# EAGLE board demo1 (EAGLE 9.0.0)

Size 100 x 80 mm. Coordinates in mm from the lower left corner, seen from the top.
Outline: 0,0 100,0 100,80 0,80 0,0
Copper layers (1*16): Top 0.035mm / dielectric 1.5mm / Bottom 0.035mm
Design rules "default": minimum track width 6mil, minimum drill 0.35mm, track to track 6mil, track to pad 6mil, pad to pad 6mil, via to via 6mil, smd to smd 6mil, copper to edge 40mil, drill to drill 6mil, minimum pad ring 10mil, minimum via ring 8mil, stop-mask expansion 4mil, vias tented up to drill 0mil, thermal gap 10mil
Net classes: 0 default: width 0.3 mm, drill 0.6 mm, clearance 0.2 mm; 1 power: width 0.4 mm, drill 0.6 mm, clearance 0.2 mm

## Footprints (pad centres in the part's own frame; a part is rotated, then mirrored left to right if it is on the bottom)
C1206 = smd 1.6 x 1.8: 1 -1.4,0; 2 1.4,0
C025-025X050 = drill 0.813 octagon: 1 -1.27,0; 2 1.27,0
TAP5-45 = drill 0.813: + -2.54,0 | drill 0.813 octagon: - 2.54,0
DO35-10 = drill 0.813 long: A 5.08,0; C -5.08,0
DIL18 = drill 0.813 long: 1 -10.16,-3.81; 2 -7.62,-3.81; 3 -5.08,-3.81; 4 -2.54,-3.81; 5 0,-3.81; 6 2.54,-3.81; 7 5.08,-3.81; 8 7.62,-3.81; 9 10.16,-3.81; 10 10.16,3.81; 11 7.62,3.81; 12 5.08,3.81; 13 2.54,3.81; 14 0,3.81; 15 -2.54,3.81; 16 -5.08,3.81; 17 -7.62,3.81; 18 -10.16,3.81
TO92 = drill 0.813 octagon: 1 -1.27,0; 2 0,1.905; 3 1.27,0
1X04 = drill 1.016 long: 1 -3.81,0; 2 -1.27,0; 3 1.27,0; 4 3.81,0
1X17 = drill 1.016 long: 1 -20.32,0; 2 -17.78,0; 3 -15.24,0; 4 -12.7,0; 5 -10.16,0; 6 -7.62,0; 7 -5.08,0; 8 -2.54,0; 9 0,0; 10 2.54,0; 11 5.08,0; 12 7.62,0; 13 10.16,0; 14 12.7,0; 15 15.24,0; 16 17.78,0; 17 20.32,0
QS = drill 0.61 long: 1 -2.54,0; 2 2.54,0
R1206 = smd 1.6 x 1.803: 1 -1.422,0; 2 1.422,0

## Placement (x,y rotation side)
C1  30p  [C1206]  72.39,49.53 0 top
C2  30p  [C1206]  63.5,50.8 0 top
C3  10n  [C025-025X050]  73.66,40.64 0 top
C4  47u/25V  [TAP5-45]  72.39,30.48 0 top
C5  47u  [TAP5-45]  81.28,34.29 0 top
D1  1N4148DO35-10  [DO35-10]  41.91,17.78 0 top
IC1  PIC16F84AP  [DIL18]  50.8,40.64 0 top
IC2  78L05Z  [TO92]  77.47,21.59 0 top
JP1  PROG  [1X04]  45.72,25.4 0 top
JP2  APPL  [1X17]  57.15,6.35 0 top
Q1  [QS]  53.34,55.88 0 top
R1  2,2k  [R1206]  71.12,17.78 0 top

## Library data of the parts
C1-C5 R1 = rcl
D1 = diode
IC1 = microchip; MF: MICROCHIP; MPN: PIC16F84A-04I/P; OC_FARNELL: 9760865; OC_NEWARK: 69K7635
IC2 = linear
JP1 JP2 = pinhead
Q1 = special

## Nets
+5V [power]: IC1.14 JP2.15 R1.2
GND [power]: C1.1 C2.1 C3.2 C4.- C5.- IC1.5 IC2.2 JP1.4 JP2.17
MCLR/PGM: D1.C IC1.4 JP1.3 JP2.1
N$1: C3.1 C4.+ IC2.1
N$2: C1.2 IC1.16 Q1.2
N$3: C2.2 IC1.15 Q1.1
N$4: D1.A R1.1
RA0: IC1.17 JP2.14
RA1: IC1.18 JP2.13
RA2: IC1.1 JP2.12
RA3: IC1.2 JP2.11
RA4: IC1.3 JP2.10
RB0: IC1.6 JP2.9
RB1: IC1.7 JP2.8
RB2: IC1.8 JP2.7
RB3: IC1.9 JP2.6
RB4: IC1.10 JP2.5
RB5: IC1.11 JP2.4
RB6/CLK: IC1.12 JP1.1 JP2.3
RB7/DATA: IC1.13 JP1.2 JP2.2
V+ [power]: C5.+ IC2.3 JP2.16

## Tracks (layer width: path | path; a pad name or v marks a point on that pad's centre or on a via)
+5V  (2 unrouted)
GND  (8 unrouted)
MCLR/PGM  (3 unrouted)
N$1  (2 unrouted)
N$2  (2 unrouted)
N$3  (2 unrouted)
N$4  (1 unrouted)
RA0  (1 unrouted)
RA1  (1 unrouted)
RA2  (1 unrouted)
RA3  (1 unrouted)
RA4  (1 unrouted)
RB0  (1 unrouted)
RB1  (1 unrouted)
RB2  (1 unrouted)
RB3  (1 unrouted)
RB4  (1 unrouted)
RB5  (1 unrouted)
RB6/CLK  (2 unrouted)
RB7/DATA  (2 unrouted)
V+  (2 unrouted)